# Altium PCB NBP5 Actel ProASIC Plus PQ208 Rev1.01.PcbDoc (part 1 of 2)
Units mm, origin at the board's own origin, x right, y up, seen from the top; angles counter-clockwise.
Board outline 69 x 80.99 mm, 2 copper layers (Top Layer, Bottom Layer); 65 components, 193 nets, 558 pads, 171 vias.
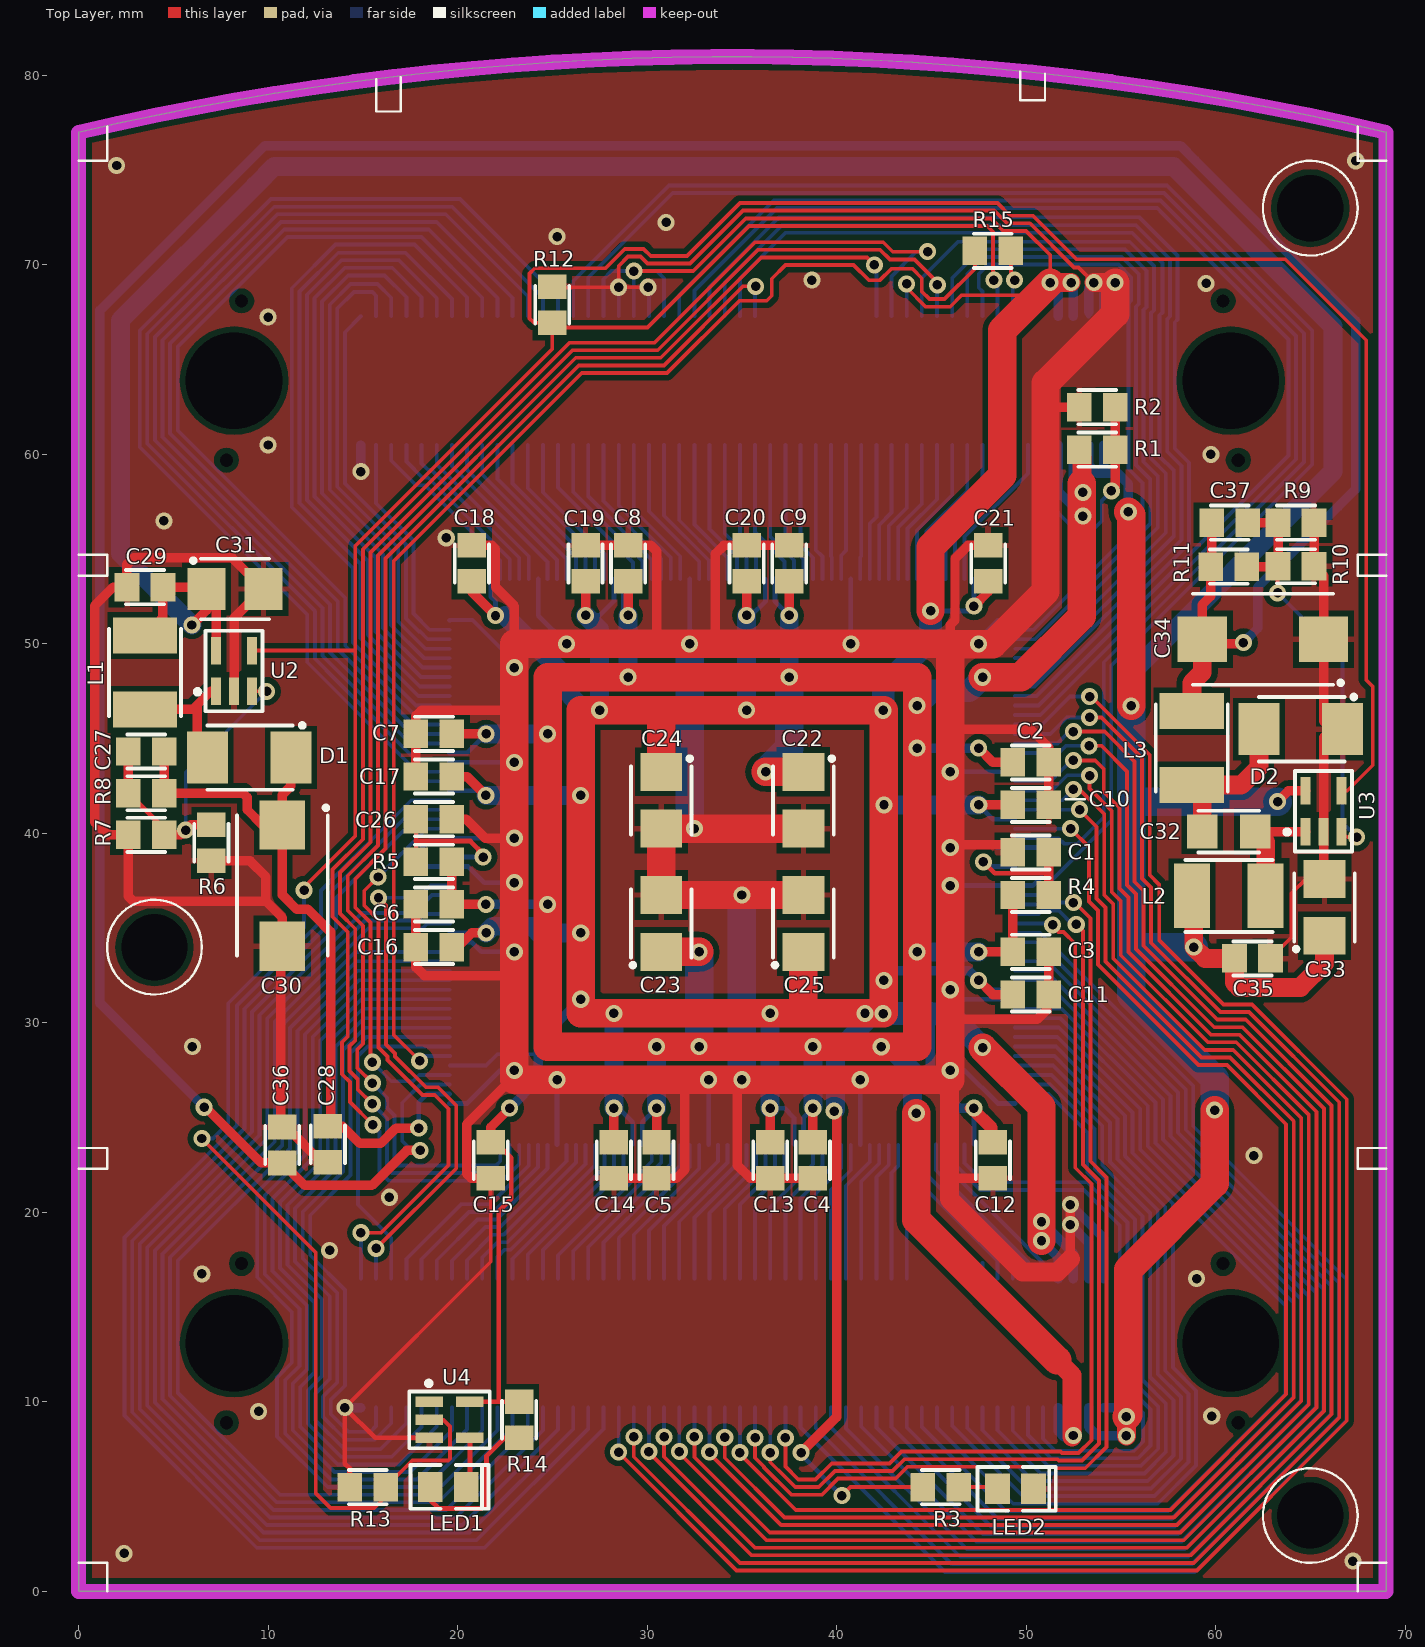
[diagram p0: Top Layer view]
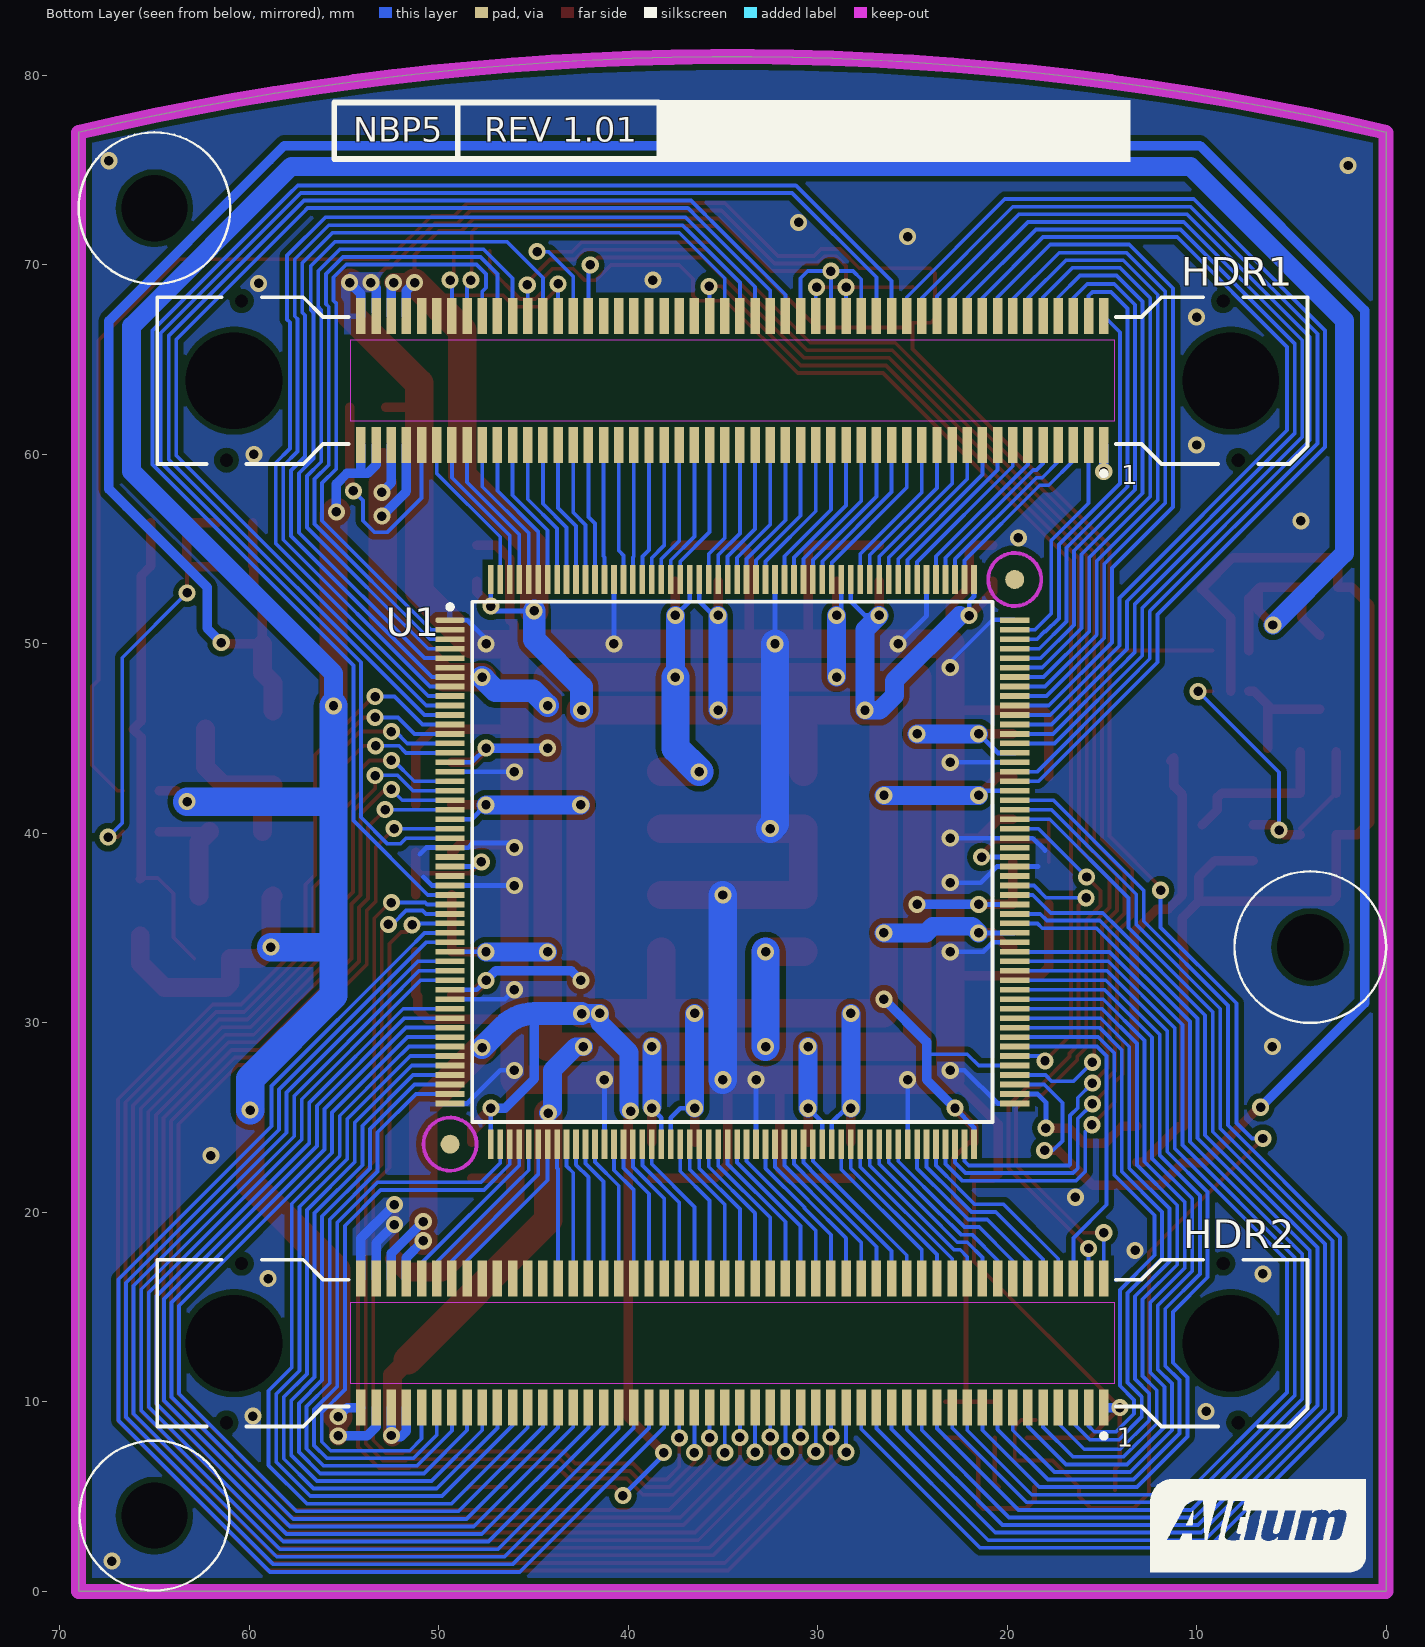
[diagram p1: Bottom Layer view, seen from below]

## Layer stack, top to bottom
Top Layer: signal copper 0.0356
Dielectric: core 0.32, FR-4, Dk 4.8
Bottom Layer: signal copper 0.0356

## Board outline
0,0 0.001,77 cw(c34.5,-69.801) 69,77 69,0

## Design rules (kind name [scope] priority, off if disabled: settings)
Clearance Clearance_Polygons [InPolygon] p1: gap=0.3
Clearance [All] p2: gap=0.2
ComponentClearance [All] p1: gap=0.2 collisioncheckmode=3 verticalgap=0.254 showdistances=FALSE
FabricationTestPointUsage TestPointUsage [All] p1 off: valid=0 allowmultiple=FALSE
FabricationTestpoint Testpoint [All] p1 off: side=3 testpointundercomponent=TRUE minsize=1.016 maxsize=2.54 preferedsize=1.524 minholesize=0 maxholesize=1.016 preferedholesize=0.813 testpointgrid=0.025 allowsidetop=TRUE allowsidebottom=TRUE usegrid=TRUE gridtolerance=0
HoleSize [All] p1: absolutevalues=TRUE maxlimit=5.2 minlimit=0.25 maxpercent=80.000 minpercent=20.000
PlaneClearance [All] p1: clearance=0.5
PlaneConnect [All] p1: planeconnectstyle=Relief reliefexpansion=0.5 reliefentries=4 reliefconductorwidth=0.25 reliefairgap=0.25
PolygonConnect [All] p1: connectstyle=Relief reliefconductorwidth=0.3 reliefentries=4 polygonreliefangle="90 Angle"
RoomDefinition Actel_APA_1_01 [InComponentClass('Actel_APA_1_01')] p1 off: confinementstyle=ConfineIn formatcopy=TRUE lockcomponents=FALSE outline 3.9,7.7 3.9,69.1 65.2,69.1 65.2,7.7 51.98,4 21.98,4 17.25,4
RoutingVias [All] p1: holewidth=0.5 width=0.9 viastyle="Through Hole" minholewidth=0.3 minwidth=0.6 maxholewidth=0.5 maxwidth=0.9
SMDNeckDown [All] p1: percent=100.000
SilkscreenOverComponentPads [All] p1: minsilkscreentomaskgap=0.254
SolderMaskExpansion SolderMaskExpansion_Vias [IsVia] p1: expansion=-0.2
SolderMaskExpansion [All] p2: expansion=0.1
Width [All] p1: maxlimit=1.5 minlimit=0.2 preferedwidth=0.5
21 further rules are at their usual default settings.

## Components (designator, comment, footprint, x,y, rotation, side; value= is the part's Value field where it differs from the comment)
C1 "0.1uF" CC2012-0805 50.25,39 r180 top
C2 "0.1uF" CC2012-0805 50.25,43.75 r180 top
C3 "0.1uF" CC2012-0805 50.25,33.75 r180 top
C4 "0.1uF" CC2012-0805 38.75,22.75 r90 top
C5 "0.1uF" CC2012-0805 30.5,22.75 r90 top
C6 "0.1uF" CC2012-0805 18.75,36.25 r0 top
C7 "0.1uF" CC2012-0805 18.75,45.25 r0 top
C8 "0.1uF" CC2012-0805 29,54.25 r270 top
C9 "0.1uF" CC2012-0805 37.5,54.25 r270 top
C10 "0.1uF" CC2012-0805 50.25,41.5 r0 top
C11 "0.1uF" CC2012-0805 50.25,31.5 r180 top
C12 "0.1uF" CC2012-0805 48.25,22.75 r90 top
C13 "0.1uF" CC2012-0805 36.5,22.75 r90 top
C14 "0.1uF" CC2012-0805 28.25,22.75 r90 top
C15 "0.1uF" CC2012-0805 21.75,22.75 r90 top
C16 "0.1uF" CC2012-0805 18.75,34 r0 top
C17 "0.1uF" CC2012-0805 18.75,43 r0 top
C18 "0.1uF" CC2012-0805 20.75,54.25 r270 top
C19 "0.1uF" CC2012-0805 26.75,54.25 r270 top
C20 "0.1uF" CC2012-0805 35.25,54.25 r270 top
C21 "0.1uF" CC2012-0805 48,54.25 r270 top
C22 "10uF" MCCT-B 38.25,41.75 r270 top
C23 "10uF" MCCT-B 30.75,35.25 r90 top
C24 "10uF" MCCT-B 30.75,41.75 r270 top
C25 "10uF" MCCT-B 38.25,35.25 r90 top
C26 "0.1uF" CC2012-0805 18.75,40.75 r0 top
C27 "10pF" CC2012-0805 3.575,44.325 r180 top
C28 "0.1uF" CC2012-0805 13.15,23.6 r270 top
C29 "0.1uF" CC2012-0805 3.5,53 r180 top
C30 "22uF 25V" MCCT-D 10.75,37.25 r270 top
C31 "10uF" MCCT-B 8.25,52.9 r0 top
C32 "1uF 25V" CC3216-1206 60.7,40.1 r180 top
C33 "10uF" MCCT-B 65.75,36.1 r90 top
C34 "22uF" MCCT-D 62.5,50.25 r180 top
C35 "0.1uF" CC2012-0805 61.95,33.4 r0 top
C36 "0.1uF" CC2012-0805 10.75,23.559 r90 top
C37 "10pF" CC2012-0805 60.75,56.4 r0 top
D1 "MBRS140T3" 403A 9,44 r0 top
D2 "MBRS140T3" 403A 64.5,45.5 r0 top
HDR1 "54075-1009" 54075 34.5,63.9 r0 bottom locked
HDR2 "54075-1009" 54075 34.5,13.1 r0 bottom locked
L1 "10uH" CC4532-1812 3.5,48.5 r270 top
L2 "10uH" CC4532-1812 60.7,36.7 r0 top
L3 "10uH" CC4532-1812 58.75,44.5 r90 top
LED1 "HSMG-C170" "SMD _LED"#1 19.5,5.5 r180 top locked
LED2 "HSMH-C170" "SMD _LED"#2 49.442,5.408 r180 top locked
R1 "82R/1%" CC2012-0805 53.75,60.25 r0 top
R2 "680R/1%" CC2012-0805 53.75,62.5 r180 top
R3 "270R" CC2012-0805 45.5,5.5 r0 top
R4 "1R" CC2012-0805 50.25,36.75 r0 top
R5 "1R" CC2012-0805 18.75,38.5 r180 top
R6 "100K" CC2012-0805 7,39.5 r270 top
R7 "18K" CC2012-0805 3.575,39.925 r180 top
R8 "180K" CC2012-0805 3.575,42.125 r180 top
R9 "6k8" CC2012-0805 64.25,56.4 r0 top
R10 "1K2" CC2012-0805 64.25,54.1 r0 top
R11 "10K" CC2012-0805 60.7,54.075 r0 top
R12 "470R" CC2012-0805 25,67.9 r90 top
R13 "1K" CC2012-0805 15.25,5.5 r0 top
R14 "270R" CC2012-0805 23.25,9.05 r90 top
R15 "33R" CC2012-0805 48.25,70.75 r180 top
U1 "APA750-PQ208I" F-QFP28X28-G208/P.5N 34.49,38.49 r180 bottom locked
U2 "LT1930" SO-G5/P.95 7.25,47.5 r90 top
U3 "LT1931" SO-G5/P.95 64.75,40.1 r90 top
U4 "SN74LVC1G04DBV" SO-G5/P.95 18.5,10 r0 top

## Footprints (in the part's own frame and the unit in brackets; to place one, negate y for a bottom-side part, rotate by r counter-clockwise, add the part's x,y. Pads: shape width x height; smd on the part's side, far side on the other; paste and mask are expansions set on the pad)
403A [mm]
  rect 2.159x2.743 smd: 1(-2.2,0) 2(2.2,0)
  silkscreen extent -2.2,-1.7 2.9,1.8
54075 [mm] "Connector; Docking Station, Receptacle; 100 Position; Vertical"
  rect 0.5x1.9 smd: 1(-19.6,3.4) 2(-19.6,-3.4) 3(-18.8,3.4) 4(-18.8,-3.4) 5(-18,3.4) 6(-18,-3.4) 7(-17.2,3.4) 8(-17.2,-3.4) 9(-16.4,3.4) 10(-16.4,-3.4) 11(-15.6,3.4) 12(-15.6,-3.4) 13(-14.8,3.4) 14(-14.8,-3.4) 15(-14,3.4) 16(-14,-3.4) 17(-13.2,3.4) 18(-13.2,-3.4) 19(-12.4,3.4) 20(-12.4,-3.4) 21(-11.6,3.4) 22(-11.6,-3.4) 23(-10.8,3.4) 24(-10.8,-3.4) 25(-10,3.4) 26(-10,-3.4) 27(-9.2,3.4) 28(-9.2,-3.4) 29(-8.4,3.4) 30(-8.4,-3.4) 31(-7.6,3.4) 32(-7.6,-3.4) 33(-6.8,3.4) 34(-6.8,-3.4) 35(-6,3.4) 36(-6,-3.4) 37(-5.2,3.4) 38(-5.2,-3.4) 39(-4.4,3.4) 40(-4.4,-3.4) 41(-3.6,3.4) 42(-3.6,-3.4) 43(-2.8,3.4) 44(-2.8,-3.4) 45(-2,3.4) 46(-2,-3.4) 47(-1.2,3.4) 48(-1.2,-3.4) 49(-0.4,3.4) 50(-0.4,-3.4) 51(0.4,3.4) 52(0.4,-3.4) 53(1.2,3.4) 54(1.2,-3.4) 55(2,3.4) 56(2,-3.4) 57(2.8,3.4) 58(2.8,-3.4) 59(3.6,3.4) 60(3.6,-3.4) 61(4.4,3.4) 62(4.4,-3.4) 63(5.2,3.4) 64(5.2,-3.4) 65(6,3.4) 66(6,-3.4) 67(6.8,3.4) 68(6.8,-3.4) 69(7.6,3.4) 70(7.6,-3.4) 71(8.4,3.4) 72(8.4,-3.4) 73(9.2,3.4) 74(9.2,-3.4) 75(10,3.4) 76(10,-3.4) 77(10.8,3.4) 78(10.8,-3.4) 79(11.6,3.4) 80(11.6,-3.4) 81(12.4,3.4) 82(12.4,-3.4) 83(13.2,3.4) 84(13.2,-3.4) 85(14,3.4) 86(14,-3.4) 87(14.8,3.4) 88(14.8,-3.4) 89(15.6,3.4) 90(15.6,-3.4) 91(16.4,3.4) 92(16.4,-3.4) 93(17.2,3.4) 94(17.2,-3.4) 95(18,3.4) 96(18,-3.4) 97(18.8,3.4) 98(18.8,-3.4) 99(19.6,3.4) 100(19.6,-3.4)
  round 0.5 hole 0.7 unplated: MH1(-26.7,4.2) MH2(-25.9,-4.2) MH3(26.7,4.2) MH4(25.9,-4.2)
  round 4.8 hole 5.1 unplated: MH5(-26.3,0) MH6(26.3,0)
  Top Layer keep-out region: -20.15,2.15 20.15,2.15 20.15,-2.15 -20.15,-2.15
  silkscreen extent -30.35,-4.4 30.35,5.02
CC2012-0805 [mm]
  rect 1.3x1.5 smd: 1(-0.95,0.003) 2(0.95,0.003)
  silkscreen extent -1,-0.9 1,0.9
CC3216-1206 [mm]
  rect 1.6x1.8 smd: 1(-1.4,0) 2(1.4,0)
  silkscreen extent -1.6,-1.1 1.6,1.1
CC4532-1812 [mm]
  rect 1.9x3.4 smd: 1(-1.95,0) 2(1.95,0)
  silkscreen extent -2.3,-1.9 2.3,1.9
F-QFP28X28-G208/P.5N [mm]
  oval 1.55x0.3 smd: 1(-14.91,12.761)
  rect 1.55x0.3 smd: 2(-14.91,12.261) 3(-14.91,11.761) 4(-14.91,11.261) 5(-14.91,10.761) 6(-14.91,10.261) 7(-14.91,9.761) 8(-14.91,9.261) 9(-14.91,8.761) 10(-14.91,8.261) 11(-14.91,7.761) 12(-14.91,7.261) 13(-14.91,6.761) 14(-14.91,6.261) 15(-14.91,5.761) 16(-14.91,5.261) 17(-14.91,4.761) 18(-14.91,4.261) 19(-14.91,3.761) 20(-14.91,3.261) 21(-14.91,2.761) 22(-14.91,2.261) 23(-14.91,1.761) 24(-14.91,1.261) 25(-14.91,0.761) 26(-14.91,0.261) 27(-14.91,-0.239) 28(-14.91,-0.739) 29(-14.91,-1.239) 30(-14.91,-1.739) 31(-14.91,-2.239) 32(-14.91,-2.739) 33(-14.91,-3.239) 34(-14.91,-3.739) 35(-14.91,-4.239) 36(-14.91,-4.739) 37(-14.91,-5.239) 38(-14.91,-5.739) 39(-14.91,-6.239) 40(-14.91,-6.739) 41(-14.91,-7.239) 42(-14.91,-7.739) 43(-14.91,-8.239) 44(-14.91,-8.739) 45(-14.91,-9.239) 46(-14.91,-9.739) 47(-14.91,-10.239) 48(-14.91,-10.739) 49(-14.91,-11.239) 50(-14.91,-11.739) 51(-14.91,-12.239) 52(-14.91,-12.739) 105(14.89,-12.739) 106(14.89,-12.239) 107(14.89,-11.739) 108(14.89,-11.239) 109(14.89,-10.739) 110(14.89,-10.239) 111(14.89,-9.739) 112(14.89,-9.239) 113(14.89,-8.739) 114(14.89,-8.239) 115(14.89,-7.739) 116(14.89,-7.239) 117(14.89,-6.739) 118(14.89,-6.239) 119(14.89,-5.739) 120(14.89,-5.239) 121(14.89,-4.739) 122(14.89,-4.239) 123(14.89,-3.739) 124(14.89,-3.239) 125(14.89,-2.739) 126(14.89,-2.239) 127(14.89,-1.739) 128(14.89,-1.239) 129(14.89,-0.739) 130(14.89,-0.239) 131(14.89,0.261) 132(14.89,0.761) 133(14.89,1.261) 134(14.89,1.761) 135(14.89,2.261) 136(14.89,2.761) 137(14.89,3.261) 138(14.89,3.761) 139(14.89,4.261) 140(14.89,4.761) 141(14.89,5.261) 142(14.89,5.761) 143(14.89,6.261) 144(14.89,6.761) 145(14.89,7.261) 146(14.89,7.761) 147(14.89,8.261) 148(14.89,8.761) 149(14.89,9.261) 150(14.89,9.761) 151(14.89,10.261) 152(14.89,10.761) 153(14.89,11.261) 154(14.89,11.761) 155(14.89,12.261) 156(14.89,12.761)
  rect 0.3x1.55 smd: 53(-12.76,-14.889) 54(-12.26,-14.889) 55(-11.76,-14.889) 56(-11.26,-14.889) 57(-10.76,-14.889) 58(-10.26,-14.889) 59(-9.76,-14.889) 60(-9.26,-14.889) 61(-8.76,-14.889) 62(-8.26,-14.889) 63(-7.76,-14.889) 64(-7.26,-14.889) 65(-6.76,-14.889) 66(-6.26,-14.889) 67(-5.76,-14.889) 68(-5.26,-14.889) 69(-4.76,-14.889) 70(-4.26,-14.889) 71(-3.76,-14.889) 72(-3.26,-14.889) 73(-2.76,-14.889) 74(-2.26,-14.889) 75(-1.76,-14.889) 76(-1.26,-14.889) 77(-0.76,-14.889) 78(-0.26,-14.889) 79(0.24,-14.889) 80(0.74,-14.889) 81(1.24,-14.889) 82(1.74,-14.889) 83(2.24,-14.889) 84(2.74,-14.889) 85(3.24,-14.889) 86(3.74,-14.889) 87(4.24,-14.889) 88(4.74,-14.889) 89(5.24,-14.889) 90(5.74,-14.889) 91(6.24,-14.889) 92(6.74,-14.889) 93(7.24,-14.889) 94(7.74,-14.889) 95(8.24,-14.889) 96(8.74,-14.889) 97(9.24,-14.889) 98(9.74,-14.889) 99(10.24,-14.889) 100(10.74,-14.889) 101(11.24,-14.889) 102(11.74,-14.889) 103(12.24,-14.889) 104(12.74,-14.889) 157(12.74,14.911) 158(12.24,14.911) 159(11.74,14.911) 160(11.24,14.911) 161(10.74,14.911) 162(10.24,14.911) 163(9.74,14.911) 164(9.24,14.911) 165(8.74,14.911) 166(8.24,14.911) 167(7.74,14.911) 168(7.24,14.911) 169(6.74,14.911) 170(6.24,14.911) 171(5.74,14.911) 172(5.24,14.911) 173(4.74,14.911) 174(4.24,14.911) 175(3.74,14.911) 176(3.24,14.911) 177(2.74,14.911) 178(2.24,14.911) 179(1.74,14.911) 180(1.24,14.911) 181(0.74,14.911) 182(0.24,14.911) 183(-0.26,14.911) 184(-0.76,14.911) 185(-1.26,14.911) 186(-1.76,14.911) 187(-2.26,14.911) 188(-2.76,14.911) 189(-3.26,14.911) 190(-3.76,14.911) 191(-4.26,14.911) 192(-4.76,14.911) 193(-5.26,14.911) 194(-5.76,14.911) 195(-6.26,14.911) 196(-6.76,14.911) 197(-7.26,14.911) 198(-7.76,14.911) 199(-8.26,14.911) 200(-8.76,14.911) 201(-9.26,14.911) 202(-9.76,14.911) 203(-10.26,14.911) 204(-10.76,14.911) 205(-11.26,14.911) 206(-11.76,14.911) 207(-12.26,14.911) 208(-12.76,14.911)
  round 1 smd mask+1: FID1(-14.91,-14.889) FID2(14.89,14.911)
  Top Layer keep-out circle w0.2: c14.89,14.911 r1.4
  Top Layer keep-out circle w0.2: c-14.91,-14.889 r1.4
  silkscreen extent -15.03,-13.71 13.72,13.74
MCCT-B [mm]
  rect 2x2.2 smd: 1(-1.5,0) 2(1.5,0)
  silkscreen extent -2.3,-1.6 1.8,1.6
MCCT-D [mm]
  rect 2.6x2.4 smd: 1(-3.2,0) 2(3.2,0)
  silkscreen extent -4.2,-2.4 3.7,2.4
"SMD _LED"#1 [mm]
  rect 1.3x1.6 smd: 1(0.943,-0.012) 2(-0.957,-0.012)
  silkscreen extent -2.14,-1.16 1.99,1.14
"SMD _LED"#2 [mm]
  rect 1.3x1.6 smd: 1(0.95,0) 2(-0.95,0)
  silkscreen extent -2.13,-1.15 2,1.15
SO-G5/P.95 [mm]
  rect 1.45x0.55 smd: 1(0,0) 2(0,-0.95) 3(0,-1.9) 4(2.15,-1.9) 5(2.15,0)
  silkscreen extent -1.05,-2.45 3.2,1.1

## Part data
C1 C2 C3 C4 C5 C6 C7 C8 C9 C10 C11 C12 C13 C14 C15 C16 C17 C18 C19 C20 C21 C26 C27 C28 C29 C32 C35 C36 C37: library part CAP, "Capacitor"
C22 C23 C24 C25 C30 C31 C33 C34: library part CAP_POLAR, "Polar Capacitor"
D1 D2: library part Shottky, "Shottky Diode"
HDR1 HDR2: "Board-to-Board, Docking Station, 0.80mm (.031\") Pitch, Shielded Receptacle, Vertical, Ultra Low Profile, SMT"
L1 L2 L3: library part INDUCTOR, "Inductor"
LED1 LED2: library part HSMX-C670, "Typical RED GaAs SMD LED Agilent make"
R1 R2 R3 R4 R5 R6 R7 R8 R9 R10 R11 R12 R13 R14 R15: library part RES, "Resistor"
U1: "ProASICPlus APA750 Flash FPGA, 156 User IOs, 208-Pin PQFP, Speed Grade Standard, Industrial Grade"
U2 U3: "Switching Regulator"
U4: library part SN74AHC1G04DBVR

## Free pads (board coordinates)
  round 3.2 hole 3.5 unplated: LP(4,34) LP(65,4) LP(65,73)

## Via types
v1: diameter 0.9, hole 0.5, Top Layer to Bottom Layer, tented bottom, 171 vias

## Nets (pads, with @x,y where several pads share a name; then routed paths per layer and width w, separated by ;. In a path a pad name is that pad's centre, name@x,y a point inside that pad or via, vN(x,y) a via of type N, cw(c..) or ccw(c..) an arc to the next point about the centre after c; other vN are vias at no path point)
5V: C29.1 C31.1 C33.1 C35.1 HDR1.97 HDR1.99 HDR2.97 HDR2.99 L1.1 L2.1 U2.5 U3.5 | length 213.5
  Top Layer w0.5: L1.1@3.5,50.45 4.45,51.4 C29.1@4.45,52.997 6.653,52.997 7.25,52.4 U2.5@7.25,49.65 ; v1(5.975,51) 6.75,51.775 C31.1@6.75,52.9 ; v1(63.275,41.675) 63.85,42.25 U3.5@64.75,42.25
  Top Layer w1: v1(55.3,8.2) v1(55.3,9.225) ; L2.1@58.75,36.7 58.85,36.6 v1(58.85,34) 59.447,33.403 C35.1@61,33.403 61,32.125 61.25,31.875 64.475,31.875 65.75,33.15 C33.1@65.75,34.6
  Top Layer w1.5: v1(55.3,9.225) 55.4,9.325 55.4,16.975 59.95,21.525 v1(59.95,25.4) ; v1(55.4,56.975) 55.55,56.825 v1(55.55,46.735)
  Bottom Layer w0.5: HDR2.97@53.3,9.7 53.3,8.675 53.775,8.2 v1(55.3,8.2) ; HDR1.97@53.3,60.5 53.3,59.45 53.75,59 54.85,59 55.4,58.45 v1(55.4,56.975) ; HDR2.99@54.1,9.7 54.825,9.7 v1(55.3,9.225) ; HDR1.99@54.1,60.5 54.1,59.125 54.225,59
  Bottom Layer w1: v1(5.975,51) 2.2,54.775 2.2,67.075 9.315,74.19 10.325,75.2 57.775,75.2 66.2,66.775 66.2,59.1 55.55,48.45 v1(55.55,46.735)
  Bottom Layer w1.5: 55.55,34 v1(58.85,34) ; v1(55.55,46.735) 55.55,31.45 59.95,27.05 v1(59.95,25.4) ; 55.725,41.675 v1(63.275,41.675)
AUDIO_SPI_CSN: HDR1.11 U1.161 | length 9.1
  Bottom Layer w0.2: HDR1.11@18.9,60.5 18.9,59.475 23.75,54.625 U1.161@23.75,53.425
AVDD1: C1.1 R4.2 U1.27 | length 8.1
  Top Layer w0.25: v1(47.75,38.5) 48.35,37.9 50.9,37.9 51,38 C1.1@51.35,38.375
  Top Layer w0.5: R4.2@51.2,36.753 C1.1@51.2,38.997
  Bottom Layer w0.25: v1(47.75,38.5) 48,38.25 U1.27@49.425,38.25
AVDD2: C26.1 R5.2 U1.131 | length 8
  Top Layer w0.2: R5.2@17.8,38.497 C26.1@17.8,40.753
  Top Layer w0.25: 17.8,39.6 20.675,39.6 21.1,39.175 21.1,39 v1(21.35,38.75)
  Bottom Layer w0.25: U1.131@19.6,38.751 v1(21.35,38.75)
BLUE0: HDR1.14 U1.148 | length 36.4
  Bottom Layer w0.2: U1.148@19.575,47.25 17.925,47.25 14.869,50.306 14.869,54.215 11.65,57.434 11.65,68.6 13.7,70.65 17.25,70.65 19.7,68.2 HDR1.14@19.7,67.3
BLUE1: HDR1.16 U1.147 | length 38.9
  Bottom Layer w0.2: U1.147@19.575,46.75 17.8,46.75 14.469,50.081 14.469,54.006 11.25,57.225 11.25,68.775 13.55,71.075 17.725,71.075 20.5,68.3 HDR1.16@20.5,67.3
BOC_CTS: HDR1.13 U1.163 | length 9.2
  Bottom Layer w0.2: HDR1.13@19.7,60.5 19.7,59.375 24.75,54.325 U1.163@24.75,53.425
BOC_RTS: HDR1.17 U1.165 | length 8.9
  Bottom Layer w0.2: HDR1.17@21.3,60.5 21.3,58.941 25.75,54.491 U1.165@25.75,53.425
BOC_RX: HDR1.19 U1.166 | length 8.8
  Bottom Layer w0.2: HDR1.19@22.1,60.5 22.1,58.706 26.25,54.556 U1.166@26.25,53.425
BOC_TX: HDR1.15 U1.164 | length 9
  Bottom Layer w0.2: HDR1.15@20.5,60.5 20.5,59.175 25.25,54.425 U1.164@25.25,53.425
BUZZER: HDR2.24 U1.91 | length 9
  Bottom Layer w0.2: HDR2.24@23.7,16.5 23.7,17.775 28.25,22.325 U1.91@28.25,23.575
CAN_RXD: HDR1.4 U1.153 | length 24.7
  Bottom Layer w0.2: HDR1.4@15.7,67.3 15.7,68.375 15.5,68.575 14.525,68.575 13.65,67.7 13.65,58.3 16.869,55.081 16.869,51.181 18.3,49.75 U1.153@19.575,49.75
CAN_TXD: HDR1.2 U1.154 | length 20.4
  Bottom Layer w0.2: HDR1.2@14.9,67.3 14.05,66.45 14.05,58.475 17.269,55.256 17.269,51.346 17.966,50.65 18.025,50.65 18.425,50.25 U1.154@19.575,50.25
FPGA_AUX0: HDR1.86 R12.1 R13.2 U2.4 U3.4 U4.2 | length 197.7
  Top Layer w0.2: v1(6.5,23.9) 12.508,17.892 12.508,5.192 13.3,4.4 15.6,4.4 16.2,5 R13.2@16.2,5.503 17.605,6.907 19.507,6.907 19.6,7 19.6,8.7 19.25,9.05 U4.2@18.5,9.05 ; U2.4@9.15,49.65 14.55,49.65 ; v1(11.9,37) 11.9,37.163 14.6,39.863 14.6,55.166 24.997,65.563 R12.1@24.997,66.95 ; v1@48.25,69.25 v1(48.3,69.2) ; 48.25,69.65 48.25,71.75 47.95,72.05 35.375,72.05 30.025,66.7 25.247,66.7 R12.1@24.997,66.95 ; U3.4@66.65,42.25 66.95,42.25 68.3,43.6 68.3,47.75 67.95,48.1 67.95,66.025 63.675,70.3 52.666,70.3 50.366,72.6 49.166,72.6 48.491,73.275 34.9,73.275 32.1,70.475 30.191,70.475 29.816,70.85 28.825,70.85 27.8,69.825 24.075,69.825 23.8,69.55 23.8,67.175 24.025,66.95 R12.1@24.997,66.95
  Bottom Layer w0.2: v1(6.5,23.9) 7.084,23.9 7.9,24.716 7.9,31.041 11.9,35.041 v1(11.9,37) ; v1(48.3,69.2) 48.5,69 HDR1.86@48.5,67.3 48.5,68.3
FPGA_AUX1: HDR1.88 R15.1 | length 7.1
  Top Layer w0.2: v1@49.1,69.2 49.2,69.3 R15.1@49.2,70.747 49.2,69.4 v1(49.4,69.2)
  Bottom Layer w0.2: v1@49.1,69.2 49.3,69 HDR1.88@49.3,67.3 49.3,69.1 v1(49.4,69.2)
FPGA_AUX2: HDR1.90
FPGA_AUX3: HDR1.92
FPGA_CCLK: HDR1.66
FPGA_CLK: HDR2.2 U1.134 | length 31.1
  Top Layer w0.2: v1(14.9,18.925) 15.959,18.925 19.525,22.491 19.525,25.469 18.794,26.2 18.15,26.2 16.3,28.05 16.3,28.225 15.825,28.7 15.825,35.438 15.075,36.188 15.075,36.975 v1(15.8,37.7)
  Bottom Layer w0.2: HDR2.2@14.9,16.5 v1(14.9,18.925) ; v1(15.8,37.7) 18.351,40.251 U1.134@19.6,40.251
FPGA_CLK_1: HDR1.30 U1.30 | length 83.1
  Bottom Layer w0.2: HDR1.30@26.1,67.3 26.1,69.15 30.432,73.482 31.15,74.2 57.441,74.2 57.944,73.696 57.954,73.696 65.1,66.55 65.1,59.469 54.5,48.869 54.5,40.675 50.575,36.75 U1.30@49.425,36.75
FPGA_CLK_2: HDR1.32 U1.24 | length 80
  Bottom Layer w0.2: HDR1.32@26.9,67.3 26.9,69.35 31.35,73.8 57.275,73.8 64.675,66.4 64.675,59.609 54.1,49.034 54.1,40.85 52.7,39.45 52.025,39.45 51.725,39.75 U1.24@49.425,39.75
FPGA_DIN: HDR1.64
FPGA_INIT: HDR1.68
FPGA_M0: HDR1.60
FPGA_M1: HDR1.58
FPGA_M2: HDR1.56
FPGA_PROGRAM: HDR1.62
FPGA_RCK: R15.2 U1.110 | length 69.6
  Top Layer w0.2: v1(18,28) 16.625,29.375 16.625,54.362 26.556,64.294 31.05,64.294 34.872,68.116 36.316,68.116 36.575,68.375 36.575,69.275 37.3,70 40.9,70 41.7,69.2 42.3,69.2 42.9,69.8 44,69.8 44.5,69.3 44.5,68.6 44.9,68.2 45.7,68.2 47.3,69.8 R15.2@47.3,70.747
  Bottom Layer w0.2: v1(18,28) 18.251,28.251 U1.110@19.6,28.251
FPGA_TCK: HDR1.72 U1.101 | length 85
  Top Layer w0.2: v1(15.525,24.625) 14.319,25.831 14.319,26.874 13.9,27.294 13.9,28.975 14.2,29.275 14.2,34.8 13.4,35.6 13.4,38.097 15,39.697 15,55 25.9,65.9 30.394,65.9 35.694,71.2 42.466,71.2 42.966,70.7 v1(44.8,70.7)
  Bottom Layer w0.2: v1(15.525,24.625) 15.875,24.275 15.875,22.15 16.35,21.675 22.375,21.675 23.25,22.55 U1.101@23.25,23.575 ; HDR1.72@42.9,67.3 42.9,69.4 44.2,70.7 v1(44.8,70.7)
FPGA_TDI: HDR1.78 U1.102 | length 81.5
  Top Layer w0.2: v1(15.5,25.725) 14.725,26.5 14.725,27.034 14.3,27.459 14.3,28.775 14.6,29.075 14.6,34.966 13.8,35.766 13.8,37.931 15.4,39.531 15.4,54.834 26.066,65.5 30.559,65.5 35.859,70.8 42.3,70.8 42.817,70.283 44.117,70.283 45.325,69.075 v1(45.325,68.95) v1@45.125,68.75
  Bottom Layer w0.2: v1(15.5,25.725) 16.275,24.95 16.275,22.325 16.525,22.075 22.2,22.075 22.75,22.625 U1.102@22.75,23.575 ; HDR1.78@45.3,67.3 45.3,68.925 v1(45.325,68.95)
FPGA_TDO: HDR1.54 U1.108 | length 59.3
  Top Layer w0.2: v1(15.5,27.925) 15.4,28.025 15.4,35.297 14.6,36.097 14.6,37.6 16.2,39.2 16.2,54.503 26.397,64.7 30.891,64.7 35.066,68.875 v1(35.725,68.875)
  Bottom Layer w0.2: v1(15.5,27.925) 16.5,26.925 17.65,26.925 17.975,27.25 U1.108@19.575,27.25 ; HDR1.54@35.7,67.3 v1@35.7,68.85
FPGA_TMS: HDR1.70 U1.103 | length 76.5
  Top Layer w0.2: v1(15.5,26.825) 14.7,27.625 14.7,28.6 15,28.9 15,35.131 14.2,35.931 14.2,37.766 15.8,39.366 15.8,54.669 26.231,65.1 30.725,65.1 36.025,70.4 41.6,70.4 v1(42,70)
  Bottom Layer w0.2: v1(15.5,26.825) 16.275,26.05 16.275,25.516 16.675,25.116 16.675,22.525 16.725,22.475 22.025,22.475 22.25,22.7 U1.103@22.25,23.575 ; v1(42,70) 42.1,70.1 HDR1.70@42.1,67.3
GND: C1.2 C2.1 C3.1 C4.1 C5.1 C6.1 C7.1 C8.1 C9.1 C10.2 C11.1 C12.1 C13.1 C14.1 C15.1 C16.1 C17.1 C18.1 C19.1 C20.1 C21.1 C22.2 C23.2 C24.2 C25.2 C26.2 C28.2 C29.2 C30.2 C31.2 C33.2 C34.1 C35.2 C36.2 D2.2 HDR1.1 HDR1.36 HDR1.40 HDR1.98 HDR1.100 HDR2.1 HDR2.98 HDR2.100 LED2.2 R2.2 R6.2 R7.2 R9.2 R10.2 R12.2 R13.1 U1.1 U1.17 U1.25 U1.29 U1.41 U1.52 U1.65 U1.81 U1.97 U1.105 U1.122 U1.130 U1.133 U1.141 U1.156 U1.162 U1.178 U1.195 U2.2 U3.2 U4.3 | length 509.2
  Top Layer w0.2: v1(14.05,9.7) 21.747,17.397 C15.1@21.747,21.8 ; R13.1@14.3,5.35 R13.1@14.3,5.503 ; R12.2@24.997,68.85 25.022,68.825 v1(30.05,68.825) ; v1(28.5,68.825) 28.5,69.95 29,70.45 29.65,70.45 30.025,70.075 32.269,70.075 35.069,72.875 48.325,72.875 49,72.2 50.2,72.2 52.525,69.875 52.775,69.875 v1(53.575,69.075) ; C35.2@62.9,33.403 64,34.503 64,36.825 64.825,37.65 C33.2@65.7,37.65
  Top Layer w0.25: R13.1@14.3,5.503 14.3,6.497 14.05,6.747 v1(14.05,9.7) 15.65,8.1 U4.3@18.95,8.1
  Top Layer w0.5: R7.2@2.625,39.872 2.625,36.675 2.875,36.425 9.875,36.425 ; R7.2@2.625,39.922 1.528,39.922 0.85,40.6 0.85,52.025 1.822,52.997 C29.2@2.55,52.997 2.55,54.2 2.9,54.55 8.1,54.55 C31.2@9.75,52.9 9.725,52.9 8.2,51.375 U2.2@8.2,47.5 ; R6.2@7.003,38.55 9.05,38.55 9.875,37.725 9.875,36.425 ; C28.2@13.153,22.65 12.825,22.65 10.966,24.509 C36.2@10.747,24.509 10.675,24.582 10.675,33.975 C30.2@10.75,34.05 10.75,35.55 9.875,36.425 ; C6.1@17.8,36.253 17.8,32.95 18.25,32.5 23,32.5 ; C17.1@17.8,43.003 17.8,46.2 18.1,46.5 23,46.5 ; C26.2@19.7,40.753 20.447,40.753 21.45,39.75 v1(23,39.75) ; C18.1@20.753,55.2 21.8,55.2 22,55 22,53 23,52 23,50 ; C15.1@21.747,21.8 20.725,21.8 20.475,22.05 20.475,24.65 22.825,27 23,27 ; C19.1@26.753,55.2 30.2,55.2 30.5,54.9 30.5,50 ; C14.1@28.247,21.8 31.55,21.8 32,22.25 32,27 ; 33.75,50 33.6,50.15 33.6,54.75 34.05,55.2 C9.1@37.503,55.2 ; v1@34.75,27 34.75,22.5 35.45,21.8 C4.1@38.747,21.8 ; v1(46,39.25) 46.15,39.4 48.898,39.4 C1.2@49.3,38.997 ; 46,45.5 50.25,45.5 51.2,44.55 C10.2@51.2,41.503 ; 46,50 46,51 46.25,51.25 46.25,54.5 46.95,55.2 C21.1@48.003,55.2 ; 46.008,21.8 C12.1@48.247,21.8 ; 46.05,30.2 50.6,30.2 51.1,30.7 51.1,31.397 C11.1@51.2,31.497 C3.1@51.2,33.747 ; 51.025,62.5 51.028,62.497 R2.2@52.8,62.497 ; 52.339,17.537 v1(52.339,20.407) ; R9.2@65.2,56.403 R10.2@65.2,54.103 65.7,53.602 65.7,45.925 66.125,45.5 65.7,45.075 65.7,37.65 C33.2@65.75,37.6
  Top Layer w1: 45.958,26.992 45.958,20.707 49.815,16.85 51.652,16.85 52.339,17.537 ; v1(53.575,69.075) v1(54.7,69.075)
  Top Layer w1.5: C25.2@38.25,36.75 C23.2@30.75,36.75 C24.2@30.75,40.25 C22.2@38.25,40.25 ; 45.958,49.992 48.25,49.992 51.025,52.767 51.025,63.75 54.701,67.418 v1(54.7,69.075) ; 23,27 46,27 46,50 23,50 23,27
  Bottom Layer w0.2: U1.156@19.61,51.261 20.789,51.261 23,49.05 v1(23,48.75) ; HDR1.36@28.5,67.3 v1(28.5,68.825) ; HDR1.40@30.1,67.3 v1@30.1,68.775
  Bottom Layer w0.25: 18,39.1 18.651,39.751 U1.133@19.6,39.751 ; 18.351,38.251 U1.130@19.6,38.251 ; U1.105@19.575,25.75 20.5,25.75 22.25,27.5 v1(23,27.5) ; U1.122@19.575,34.25 20.75,34.25 21.25,33.75 v1(23,33.75) ; U1.130@19.575,38.25 20.55,38.25 21.4,37.4 v1(23,37.4) ; U1.133@19.575,39.75 v1(23,39.75) ; U1.141@19.575,43.75 v1(23,43.75) ; U1.156@19.575,51.25 U1.156@19.61,51.25 ; U1.162@24.25,53.425 24.25,51.5 v1(25.75,50) ; U1.97@25.25,23.575 v1(25.25,27) ; v1(32.25,50) U1.178@32.25,53.425 ; U1.81@33.25,23.575 v1(33.25,27) ; v1(40.75,50) U1.195@40.75,53.425 ; U1.65@41.25,23.575 v1(41.25,27) ; v1(46,27.5) 46.75,27.5 48.5,25.75 U1.52@49.425,25.75 ; v1(46,31.75) 46.5,31.25 U1.41@49.425,31.25 ; v1(46,37.25) U1.29@49.425,37.25 ; v1(46,39.25) 46.25,39.5 48.2,39.5 48.45,39.25 U1.25@49.425,39.25 ; v1(46,43.25) U1.17@49.425,43.25 ; v1(47.5,50) 47.5,50.25 48.5,51.25 U1.1@49.425,51.25 ; U1.29@49.4,37.251 50.351,37.251 50.8,37.7 ; U1.25@49.4,39.251 50.649,39.251 51,38.9 ; HDR1.98@53.3,67.3 HDR1.98@53.3,67.5
  Bottom Layer w0.5: v1(14.05,9.7) HDR2.1@14.9,9.7 ; v1(14.9,59.1) HDR1.1@14.9,60.5 ; v1(52.339,19.357) 53.3,18.396 HDR2.98@53.3,16.5 ; v1(52.339,20.407) 54.1,18.646 HDR2.100@54.1,16.5 ; HDR1.98@53.3,67.5 53.3,68.8 v1(53.575,69.075) ; HDR1.100@54.1,67.3 54.1,68.475 v1(54.7,69.075)
  Bottom Layer w1.5: v1(32.25,50) 32.25,40.5 v1(32.5,40.25) ; v1(35,27) v1(35,36.75)
  other v1: 67.25,1.6 2.4,2 59.8,9.25 9.5,9.5 59,16.5 6.5,16.75 13.25,18 16.4,20.8 62.025,23 6,28.75 19.4,55.6 4.5,56.5 59.75,60 10,60.5 10,67.25 59.5,69.025 38.7,69.2 25.25,71.5 31,72.25 2,75.25 67.4,75.5
GREEN0: HDR1.10 U1.150 | length 31.8
  Bottom Layer w0.2: HDR1.10@18.1,67.3 18.1,68.3 16.55,69.85 14.05,69.85 12.45,68.25 12.45,57.784 15.669,54.565 15.669,50.656 18.075,48.25 U1.150@19.575,48.25
GREEN1: HDR1.12 U1.149 | length 34.1
  Bottom Layer w0.2: HDR1.12@18.9,67.3 18.9,68.25 16.9,70.25 13.875,70.25 12.05,68.425 12.05,57.6 15.269,54.381 15.269,50.481 18,47.75 U1.149@19.575,47.75
HDRIVE: HDR1.18 U1.146 | length 47.2
  Bottom Layer w0.2: U1.146@19.575,46.25 17.725,46.25 14.069,49.906 14.069,52.431 5.225,61.275 5.225,65.675 11.025,71.475 18.1,71.475 21.3,68.275 HDR1.18@21.3,67.3
IO0: HDR2.7 U1.114 | length 35.1
  Bottom Layer w0.2: HDR2.7@17.3,9.7 17.3,8.875 15.925,7.5 14.025,7.5 12.5,9.025 12.5,10.45 13.25,11.2 13.25,15.578 11.425,17.403 11.425,20.2 13.55,22.325 13.55,28.743 15.057,30.25 U1.114@19.575,30.25
IO1: HDR2.9 U1.115 | length 37.6
  Bottom Layer w0.2: HDR2.9@18.1,9.7 18.1,8.675 16.525,7.1 13.85,7.1 12.1,8.85 12.1,10.616 12.85,11.366 12.85,15.413 11.025,17.238 11.025,20.375 13.15,22.5 13.15,28.909 14.991,30.75 U1.115@19.575,30.75
IO2: HDR2.11 U1.116 | length 39.9
  Bottom Layer w0.2: HDR2.11@18.9,9.7 18.9,8.7 16.9,6.7 13.675,6.7 11.7,8.675 11.7,10.8 12.45,11.55 12.45,15.247 10.625,17.072 10.625,20.55 12.75,22.675 12.75,29.075 14.925,31.25 U1.116@19.575,31.25
IO3: HDR2.13 U1.117 | length 42.4
  Bottom Layer w0.2: U1.117@19.575,31.75 14.86,31.75 12.35,29.24 12.35,22.85 10.225,20.725 10.225,16.906 12.05,15.081 12.05,11.716 11.3,10.966 11.3,8.5 13.5,6.3 17.5,6.3 19.7,8.5 HDR2.13@19.7,9.7
IO4: HDR2.15 U1.118 | length 44.7
  Bottom Layer w0.2: U1.118@19.575,32.25 14.794,32.25 11.95,29.406 11.95,23.025 9.825,20.9 9.825,16.741 11.65,14.916 11.65,11.9 10.9,11.15 10.9,8.325 13.325,5.9 17.85,5.9 20.5,8.55 HDR2.15@20.5,9.7
IO5: HDR2.17 U1.119 | length 47.1
  Bottom Layer w0.2: U1.119@19.575,32.75 14.728,32.75 11.55,29.572 11.55,23.2 9.425,21.075 9.425,16.575 11.25,14.75 11.25,12.066 10.475,11.291 10.475,8.175 13.15,5.5 18.3,5.5 21.3,8.5 HDR2.17@21.3,9.7
IO6: HDR2.19 U1.120 | length 53.3
  Bottom Layer w0.2: U1.120@19.575,33.25 14.663,33.25 11.15,29.737 11.15,23.375 5.225,17.45 5.225,14.975 5.225,10.5 10.625,5.1 18.7,5.1 22.1,8.5 HDR2.19@22.1,9.7
IO7: HDR2.21 U1.121 | length 55.6
  Bottom Layer w0.2: U1.121@19.575,33.75 14.597,33.75 10.75,29.903 10.75,23.559 4.825,17.634 4.825,10.325 10.45,4.7 18.975,4.7 22.9,8.625 HDR2.21@22.9,9.7
IO8: HDR2.23 U1.124 | length 58.3
  Bottom Layer w0.2: U1.124@19.6,35.251 18.401,35.251 18.15,35 15.281,35 10.35,30.069 10.35,23.725 4.425,17.8 4.425,10.15 10.275,4.3 19.4,4.3 23.7,8.6 HDR2.23@23.7,9.7
IO9: HDR2.25 U1.125 | length 60.7
  Bottom Layer w0.2: U1.125@19.6,35.751 18.251,35.751 17.9,35.4 15.116,35.4 14.266,34.55 13.616,33.9 9.95,30.234 9.95,23.909 4.025,17.984 4.025,9.975 10.1,3.9 19.9,3.9 24.5,8.5 HDR2.25@24.5,9.7
IO10: HDR2.27 U1.127 | length 63.3
  Bottom Layer w0.2: U1.127@19.6,36.751 18.651,36.751 17.7,35.8 14.95,35.8 14.125,34.975 9.55,30.4 9.55,24.075 3.625,18.15 3.625,9.8 9.925,3.5 20.25,3.5 25.3,8.55 HDR2.27@25.3,9.7
IO11: HDR2.29 U1.135 | length 68
  Bottom Layer w0.2: U1.135@19.6,40.751 17.751,40.751 13.588,36.588 13.588,35.022 9.15,30.584 9.15,24.259 3.225,18.334 3.225,9.625 9.75,3.1 20.625,3.1 26.1,8.575 HDR2.29@26.1,9.7
IO12: HDR2.31 U1.136 | length 70.5
  Bottom Layer w0.2: U1.136@19.6,41.251 17.651,41.251 13.188,36.788 13.188,35.188 8.75,30.75 8.75,24.425 2.825,18.5 2.825,16.025 2.825,9.45 9.575,2.7 21,2.7 26.9,8.6 HDR2.31@26.9,9.7 ; U1.136@19.6,41.3 U1.136@19.8,41.3
IO13: HDR2.33 U1.137 | length 72.7
  Bottom Layer w0.2: U1.137@19.6,41.751 17.551,41.751 12.788,36.988 12.788,35.363 8.35,30.925 8.35,24.6 2.425,18.675 2.425,9.275 9.4,2.3 21.425,2.3 27.7,8.575 HDR2.33@27.7,9.7
IO14: HDR2.35 U1.12 | length 96
  Top Layer w0.2: v1(28.5,7.35) 28.5,7.325 34.725,1.1 59.025,1.1 66.925,9 66.925,25.975 61.924,30.976 60.425,30.976 57.025,34.375 57.025,37.3 56.525,37.8 56.525,44.141 54.285,46.38 53.441,47.225 v1(53.35,47.225)
  Bottom Layer w0.2: v1(28.5,7.35) HDR2.35@28.5,9.7 ; U1.12@49.4,45.751 50.851,45.751 52.325,47.225 v1(53.35,47.225)
IO15: HDR2.37 U1.13 | length 93.3
  Top Layer w0.2: v1(29.3,8.15) 29.3,7.1 34.9,1.5 58.85,1.5 66.525,9.175 66.525,25.809 61.759,30.575 60.26,30.575 56.6,34.235 56.6,37.141 56.125,37.616 56.125,43.975 53.975,46.125 v1(53.35,46.125)
  Bottom Layer w0.2: v1(29.3,8.15) HDR2.37@29.3,9.7 ; U1.13@49.4,45.251 51.276,45.251 52.15,46.125 v1(53.35,46.125)
IO16: HDR2.39 U1.14 | length 90.4
  Top Layer w0.2: v1(30.1,7.375) 30.1,7.325 35.525,1.9 58.675,1.9 66.125,9.35 66.125,25.643 61.593,30.175 60.094,30.175 56.2,34.069 56.2,36.975 55.725,37.45 55.725,43.8 54.15,45.375 v1(52.5,45.375)
  Bottom Layer w0.2: v1(30.1,7.375) HDR2.39@30.1,9.7 ; U1.14@49.4,44.751 51.661,44.751 v1@52.284,45.375
IO17: HDR2.41 U1.15 | length 88
  Top Layer w0.2: v1(30.9,8.15) 30.9,7.1 35.7,2.3 58.5,2.3 65.725,9.525 65.725,25.478 61.428,29.775 59.928,29.775 59.646,30.057 55.8,33.903 55.8,36.8 55.325,37.275 55.325,43.275 53.975,44.625 v1(53.325,44.625)
  Bottom Layer w0.2: v1(30.9,8.15) HDR2.41@30.9,9.7 ; U1.15@49.4,44.251 51.726,44.251 52.1,44.625 v1(53.325,44.625)
IO18: HDR2.43 U1.18 | length 85.4
  Top Layer w0.2: v1(31.7,7.375) 31.7,7.3 36.3,2.7 58.325,2.7 65.325,9.7 65.325,25.312 61.262,29.375 59.763,29.375 55.4,33.738 55.4,36.625 54.925,37.1 54.925,41.356 54.1,42.181 54.1,43.4 53.65,43.85 v1(52.5,43.85)
  Bottom Layer w0.2: v1(31.7,7.375) HDR2.43@31.7,9.7 ; U1.18@49.4,42.751 51.286,42.751 52.384,43.85 v1(52.5,43.85)
IO19: HDR2.45 U1.19 | length 82.7
  Top Layer w0.2: v1(32.5,8.15) 32.5,7.075 36.475,3.1 58.15,3.1 64.925,9.875 64.925,25.146 61.096,28.975 59.597,28.975 55,33.572 55,36.441 54.525,36.916 54.525,41.191 53.35,42.366 v1(53.35,43.05)
  Bottom Layer w0.2: v1(32.5,8.15) HDR2.45@32.5,9.7 ; U1.19@49.4,42.251 51.351,42.251 52.175,43.075 53.325,43.075 v1(53.35,43.05)
IO20: HDR2.47 U1.20 | length 79.6
  Top Layer w0.2: v1(33.3,7.35) 33.3,7.275 37.075,3.5 57.975,3.5 64.525,10.05 64.525,23.481 64.525,24.981 60.931,28.575 59.431,28.575 59.078,28.928 54.6,33.406 54.6,36.275 54.125,36.75 54.125,41.025 52.825,42.325 v1(52.5,42.325)
  Bottom Layer w0.2: v1(33.3,7.35) HDR2.47@33.3,9.7 ; U1.20@49.4,41.751 51.926,41.751 v1(52.5,42.325)
IO21: HDR2.49 U1.21 | length 76.6
  Top Layer w0.2: v1(34.1,8.125) 34.1,7.05 37.25,3.9 57.8,3.9 64.125,10.225 64.125,24.815 60.765,28.175 59.266,28.175 54.2,33.241 54.2,36.091 53.725,36.566 53.725,40.35 v1(52.824,41.251)
  Bottom Layer w0.2: v1(34.1,8.125) HDR2.49@34.1,9.7 ; U1.21@49.4,41.251 v1(52.824,41.251)
IO22: HDR2.51 U1.23 | length 73.4
  Top Layer w0.2: v1(34.9,7.325) 34.9,7.25 37.85,4.3 57.625,4.3 63.725,10.4 63.725,24.649 60.599,27.775 59.1,27.775 53.8,33.075 53.8,35.925 53.325,36.4 53.325,39.278 v1(52.351,40.251)
  Bottom Layer w0.2: v1(34.9,7.325) HDR2.51@34.9,9.7 ; U1.23@49.4,40.251 v1(52.351,40.251)
IO23: HDR2.53 U1.31 | length 56
  Top Layer w0.2: v1(35.7,8.1) 35.7,7.05 36.175,6.575 36.175,6.541 37.616,5.1 39.225,5.1 40.075,5.95 43.125,5.95 43.75,6.575 51.494,6.575 51.569,6.5 53.125,6.5 54.25,7.625 54.25,21.85 53.4,22.7 53.4,35.525 v1@52.35,36.575
  Bottom Layer w0.2: v1(35.7,8.1) HDR2.53@35.7,9.7 ; U1.31@49.4,36.251 50.608,36.251 50.707,36.35 v1(52.5,36.35)
IO24: HDR2.55 U1.32 | length 53.3
  Top Layer w0.2: v1(36.5,7.325) 36.5,6.816 37.263,6.053 37.816,5.5 39.059,5.5 39.909,6.35 42.959,6.35 43.584,6.975 51.659,6.975 51.734,6.9 52.95,6.9 53.85,7.8 53.85,21.675 53,22.525 53,34.85 v1(52.65,35.2)
  Bottom Layer w0.2: v1(36.5,7.325) HDR2.55@36.5,9.7 ; U1.32@49.4,35.751 50.674,35.751 50.847,35.925 51.725,35.925 52.45,35.2 v1(52.65,35.2)
IO25: HDR2.57 U1.33 | length 50.9
  Top Layer w0.2: v1(37.3,8.1) 37.3,6.581 37.981,5.9 38.894,5.9 39.744,6.75 42.794,6.75 43.419,7.375 51.825,7.375 51.9,7.3 52.775,7.3 53.45,7.975 53.45,21.509 52.6,22.359 52.6,34.175 51.978,34.797 51.703,34.797 51.4,35.1 v1(51.4,35.175)
  Bottom Layer w0.2: v1(37.3,8.1) HDR2.57@37.3,9.7 ; U1.33@49.4,35.251 51.476,35.251 v1@51.558,35.169
IO26: HDR2.59 U1.34 | length 70.1
  Bottom Layer w0.2: HDR2.59@38.1,9.7 38.1,8.65 45.725,1.025 58.9,1.025 66.9,9.025 66.9,16.475 58.825,24.55 58.825,26.675 51.74,33.76 50.749,34.751 U1.34@49.4,34.751
IO27: HDR2.61 U1.35 | length 67.8
  Bottom Layer w0.2: HDR2.61@38.9,9.7 38.9,8.625 46.1,1.425 58.725,1.425 66.5,9.2 66.5,16.291 58.425,24.366 58.425,26.491 50.664,34.251 U1.35@49.4,34.251
IO28: HDR2.63 U1.37 | length 65.2
  Bottom Layer w0.2: HDR2.63@39.7,9.7 39.7,8.65 46.525,1.825 58.55,1.825 66.1,9.375 66.1,16.125 58.025,24.2 58.025,26.325 51.099,33.251 U1.37@49.4,33.251
IO29: HDR2.65 U1.38 | length 62.9
  Bottom Layer w0.2: HDR2.65@40.5,9.7 40.5,8.6 46.875,2.225 58.375,2.225 65.7,9.55 65.7,15.941 57.625,24.016 57.625,26.15 51.955,31.82 ; U1.38@49.4,32.751 51.033,32.751 51.959,31.825
IO30: HDR2.67 U1.39 | length 60.5
  Bottom Layer w0.2: HDR2.67@41.3,9.7 41.3,8.7 47.375,2.625 58.2,2.625 65.3,9.725 65.3,15.775 57.225,23.85 57.225,25.975 51.98,31.22 ; U1.39@49.4,32.251 50.958,32.251 51.984,31.225
IO31: HDR2.69 U1.42 | length 57.7
  Bottom Layer w0.2: HDR2.69@42.1,9.7 42.1,8.65 47.725,3.025 58.025,3.025 64.9,9.9 64.9,15.591 56.825,23.666 56.825,25.8 51.874,30.751 U1.42@49.4,30.751
IO32: HDR2.71 U1.43 | length 55.4
  Bottom Layer w0.2: HDR2.71@42.9,9.7 42.9,8.675 48.15,3.425 57.85,3.425 64.5,10.075 64.5,15.425 56.425,23.5 56.425,25.625 51.799,30.251 U1.43@49.4,30.251
IO33: HDR2.73 U1.44 | length 53.1
  Bottom Layer w0.2: HDR2.73@43.7,9.7 43.7,8.65 48.525,3.825 57.675,3.825 64.1,10.25 64.1,15.241 56.025,23.316 56.025,25.45 51.724,29.751 U1.44@49.4,29.751
IO34: HDR2.75 U1.45 | length 50.7
  Bottom Layer w0.2: HDR2.75@44.5,9.7 44.5,8.675 48.95,4.225 57.5,4.225 63.7,10.425 63.7,15.075 55.625,23.15 55.625,25.275 51.649,29.251 U1.45@49.4,29.251
IO35: HDR2.77 U1.46 | length 44.6
  Bottom Layer w0.2: HDR2.77@45.3,9.7 45.3,8.65 49.325,4.625 56.95,4.625 58.975,6.65 58.975,10.585 57.75,11.81 57.75,20.459 55.225,22.984 55.225,25.1 52.404,27.921 51.574,28.751 U1.46@49.4,28.751
JIOA0: HDR1.3 U1.155 | length 12
  Bottom Layer w0.2: HDR1.3@15.7,60.5 15.7,57.425 17.669,55.456 17.669,51.606 18.525,50.75 U1.155@19.575,50.75
JIOA1: HDR1.5 U1.158 | length 9.7
  Bottom Layer w0.2: HDR1.5@16.5,60.5 16.5,59.675 17.8,58.375 18.275,58.375 22.25,54.4 U1.158@22.25,53.425
JIOA2: HDR1.7 U1.159 | length 9.5
  Bottom Layer w0.2: HDR1.7@17.3,60.5 17.3,59.625 18.15,58.775 18.45,58.775 22.75,54.475 U1.159@22.75,53.425
JIOA3: HDR1.9 U1.160 | length 9.3
  Bottom Layer w0.2: HDR1.9@18.1,60.5 18.1,59.525 18.45,59.175 18.625,59.175 23.25,54.55 U1.160@23.25,53.425
JIOB0: HDR1.83 U1.204 | length 8.1
  Bottom Layer w0.2: U1.204@45.25,53.425 45.25,55.85 47.7,58.3 HDR1.83@47.7,60.5
JIOB1: HDR1.85 U1.205 | length 8.2
  Bottom Layer w0.2: U1.205@45.75,53.425 45.75,55.784 48.5,58.534 HDR1.85@48.5,60.5
JIOB2: HDR1.87 U1.206 | length 8.3
  Bottom Layer w0.2: U1.206@46.25,53.425 46.25,55.719 49.3,58.769 HDR1.87@49.3,60.5
JIOB3: HDR1.89 U1.207 | length 8.5
  Bottom Layer w0.2: U1.207@46.75,53.425 46.75,55.653 50.1,59.003 HDR1.89@50.1,60.5
KBCLOCK: HDR1.22 U1.144 | length 51.9
  Bottom Layer w0.2: U1.144@19.575,45.25 17.575,45.25 14.025,48.8 14.016,48.8 13.269,49.546 13.269,52.081 4.425,60.925 4.425,66.025 10.675,72.275 18.9,72.275 22.9,68.275 HDR1.22@22.9,67.3
KBDATA: HDR1.24 U1.143 | length 54.3
  Bottom Layer w0.2: U1.143@19.575,44.75 17.5,44.75 12.869,49.381 12.869,51.906 4.025,60.75 4.025,66.2 10.5,72.675 19.375,72.675 23.7,68.35 HDR1.24@23.7,67.3
LCD_BCKL: HDR2.22 U1.92 | length 9.1
  Bottom Layer w0.2: HDR2.22@22.9,16.5 22.9,17.55 27.75,22.4 U1.92@27.75,23.575
LCD_E: HDR2.26 U1.90 | length 8.8
  Bottom Layer w0.2: HDR2.26@24.5,16.5 24.5,18.009 28.75,22.259 U1.90@28.75,23.575
LED0: HDR2.60 U1.68 | length 7.8
  Bottom Layer w0.2: HDR2.60@38.1,16.5 38.1,20.75 39.75,22.4 U1.68@39.75,23.575
LED1: HDR2.62 U1.67 | length 7.6
  Bottom Layer w0.2: HDR2.62@38.9,16.5 38.9,20.984 40.25,22.334 U1.67@40.25,23.575
LED2: HDR2.64 U1.66 | length 7.5
  Bottom Layer w0.2: HDR2.64@39.7,16.5 39.7,21.175 40.75,22.225 U1.66@40.75,23.575
LED3: HDR2.66 U1.64 | length 7.6
  Bottom Layer w0.2: HDR2.66@40.5,16.5 40.5,21.409 41.75,22.659 U1.64@41.75,23.575
LED4: HDR2.68 U1.63 | length 7.5
  Bottom Layer w0.2: HDR2.68@41.3,16.5 41.3,21.625 42.25,22.575 U1.63@42.25,23.575
LED5: HDR2.70 U1.62 | length 7.3
  Bottom Layer w0.2: HDR2.70@42.1,16.5 42.1,21.859 42.75,22.509 U1.62@42.75,23.575
LED6: HDR2.72 U1.61 | length 7.2
  Bottom Layer w0.2: HDR2.72@42.9,16.5 42.9,22.094 43.25,22.444 U1.61@43.25,23.575
LED7: HDR2.74 U1.60 | length 7.1
  Bottom Layer w0.2: HDR2.74@43.7,16.5 43.7,22.3 43.75,22.35 U1.60@43.75,23.575
MOUSECLOCK: HDR1.26 U1.140 | length 57
  Bottom Layer w0.2: U1.140@19.575,43.25 18.425,43.25 13.611,48.064 13.611,48.074 12.469,49.215 12.469,51.731 3.625,60.575 3.625,66.375 10.325,73.075 19.7,73.075 24.5,68.275 HDR1.26@24.5,67.3
MOUSEDATA: HDR1.28 U1.139 | length 59.4
  Bottom Layer w0.2: U1.139@19.575,42.75 18.35,42.75 12.069,49.031 12.069,51.556 3.225,60.4 3.225,66.55 10.15,73.475 20.125,73.475 25.3,68.3 HDR1.28@25.3,67.3
NetC27_2: C27.2 R6.1 R7.1 R8.2 U2.3 | length 17.5
  Top Layer w0.2: C27.2@2.622,44.322 C27.2@2.625,44.322 ; v1@5.6,40.125 v1(5.65,40.175) ; U2.3@9.15,47.5 v1(9.925,47.5)
  Top Layer w0.25: R8.2@2.625,42.122 2.653,42.122 R7.1@4.525,40.25
  Top Layer w0.5: R8.2@2.625,42.122 C27.2@2.625,44.322 ; R7.1@4.525,39.922 5.397,39.922 v1(5.65,40.175) 5.925,40.45 R6.1@7.003,40.45
  Bottom Layer w0.2: v1(5.65,40.175) 5.65,43.225 v1(9.925,47.5)
NetC32_1: C32.1 L2.2 U3.1 | length 6.3
  Top Layer w0.5: C32.1@62.1,40.1 U3.1@64.75,40.1
  Top Layer w1: C32.1@62.1,40.1 62.65,39.55 L2.2@62.65,36.7
NetC32_2: C32.2 D2.1 L3.1 | length 7.4
  Top Layer w1: L3.1@58.75,42.55 61.35,42.55 62.3,43.5 D2.1@62.3,45.5 ; C32.2@59.3,40.1 59.3,41.55
NetC37_2: C37.2 R9.1 R10.1 R11.2 U3.3 | length 22.5
  Top Layer w0.2: v1(63.275,52.7) R10.1@63.275,54.078 ; U3.3@66.65,40.1 66.95,39.8 v1(67.45,39.8)
  Top Layer w0.5: R11.2@61.65,54.078 63.275,54.078 R10.1@63.3,54.103 R9.1@63.3,56.403 C37.2@61.7,56.403
  Bottom Layer w0.2: v1(63.275,52.7) 66.7,49.275 66.7,40.55 v1(67.45,39.8)
NetD1_1: D1.1 L1.2 U2.1 | length 6.4
  Top Layer w0.5: L1.2@3.5,46.55 6.025,46.55 6.975,47.5 U2.1@7.25,47.5 ; D1.1@6.25,44.5 6.25,46.775
NetLED1_1: LED1.1 R14.1 | length 8.6
  Top Layer w0.25: LED1.1@18.557,5.512 18.557,4.818 19,4.375 21.275,4.375 21.525,4.625 21.525,7.15 22.475,8.1 R14.1@23.247,8.1